# EAGLE board minimal_board (EAGLE 7.7.0)
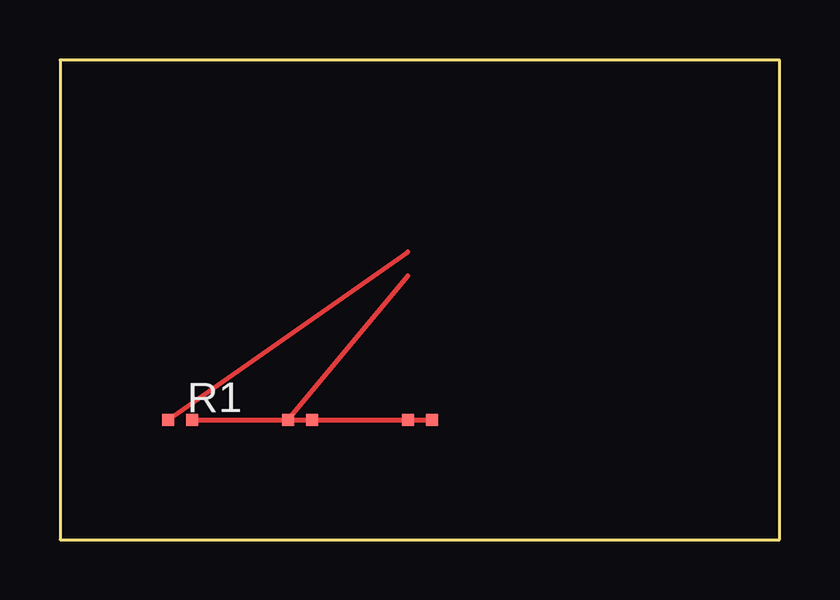
[diagram p0: board, top side]

Size 30 x 20 mm. Coordinates in mm from the lower left corner, seen from the top.
Outline: 0,0 30,0 30,20 0,20 0,0
Copper layers used: Top

## Footprints (pad centres in the part's own frame; a part is rotated, then mirrored left to right if it is on the bottom)
C0402 = smd 0.5 x 0.5: 1 -0.5,0; 2 0.5,0
R0402 = smd 0.5 x 0.5: 1 -0.5,0; 2 0.5,0

## Placement (x,y rotation side)
C1  100nF  [C0402]  15,5 0 top
R1  10k  [R0402]  5,5 0 top
R2  1k  [R0402]  10,5 0 top
U1  STM32F103C8T6  [LQFP48]  15,12 0 top

## Library data of the parts
C1 R1 R2 = rcl
U1 = ic-package

## Nets
GND: C1.2 R1.2 U1.2
SPI_MOSI: R2.1 U1.3
VCC: R1.1 U1.1

## Tracks (layer width: path | path; a pad name or v marks a point on that pad's centre or on a via)
GND
  Top 0.203: R1.2 C1.2
SPI_MOSI
  Top 0.203: R2.1 14.5,11
VCC
  Top 0.203: R1.1 14.5,12